# Altium PCB MolsonPCB.PcbDoc (part 8 of 9)
Units mil, origin at the board's own origin, x right, y up, seen from the top; angles counter-clockwise.
Board outline 8000 x 6000 mil, 14 copper layers (TopLayer (1 oz), InternalPlane1 (0.5 oz), InternalPlane2 (0.5 oz), MidLayer1 (0.5 oz), InternalPlane3 (0.5 oz), MidLayer2 (0.5 oz), InternalPlane4 (0.5 oz), InternalPlane5 (0.5 oz), MidLayer3 (0.5 oz), InternalPlane6 (0.5 oz), MidLayer4 (0.5 oz), InternalPlane7 (0.5 oz), InternalPlane8 (0.5 oz), BottomLayer (1 oz)), stack 86.2 mil thick; 657 components, 643 nets, 3094 pads, 1958 vias.
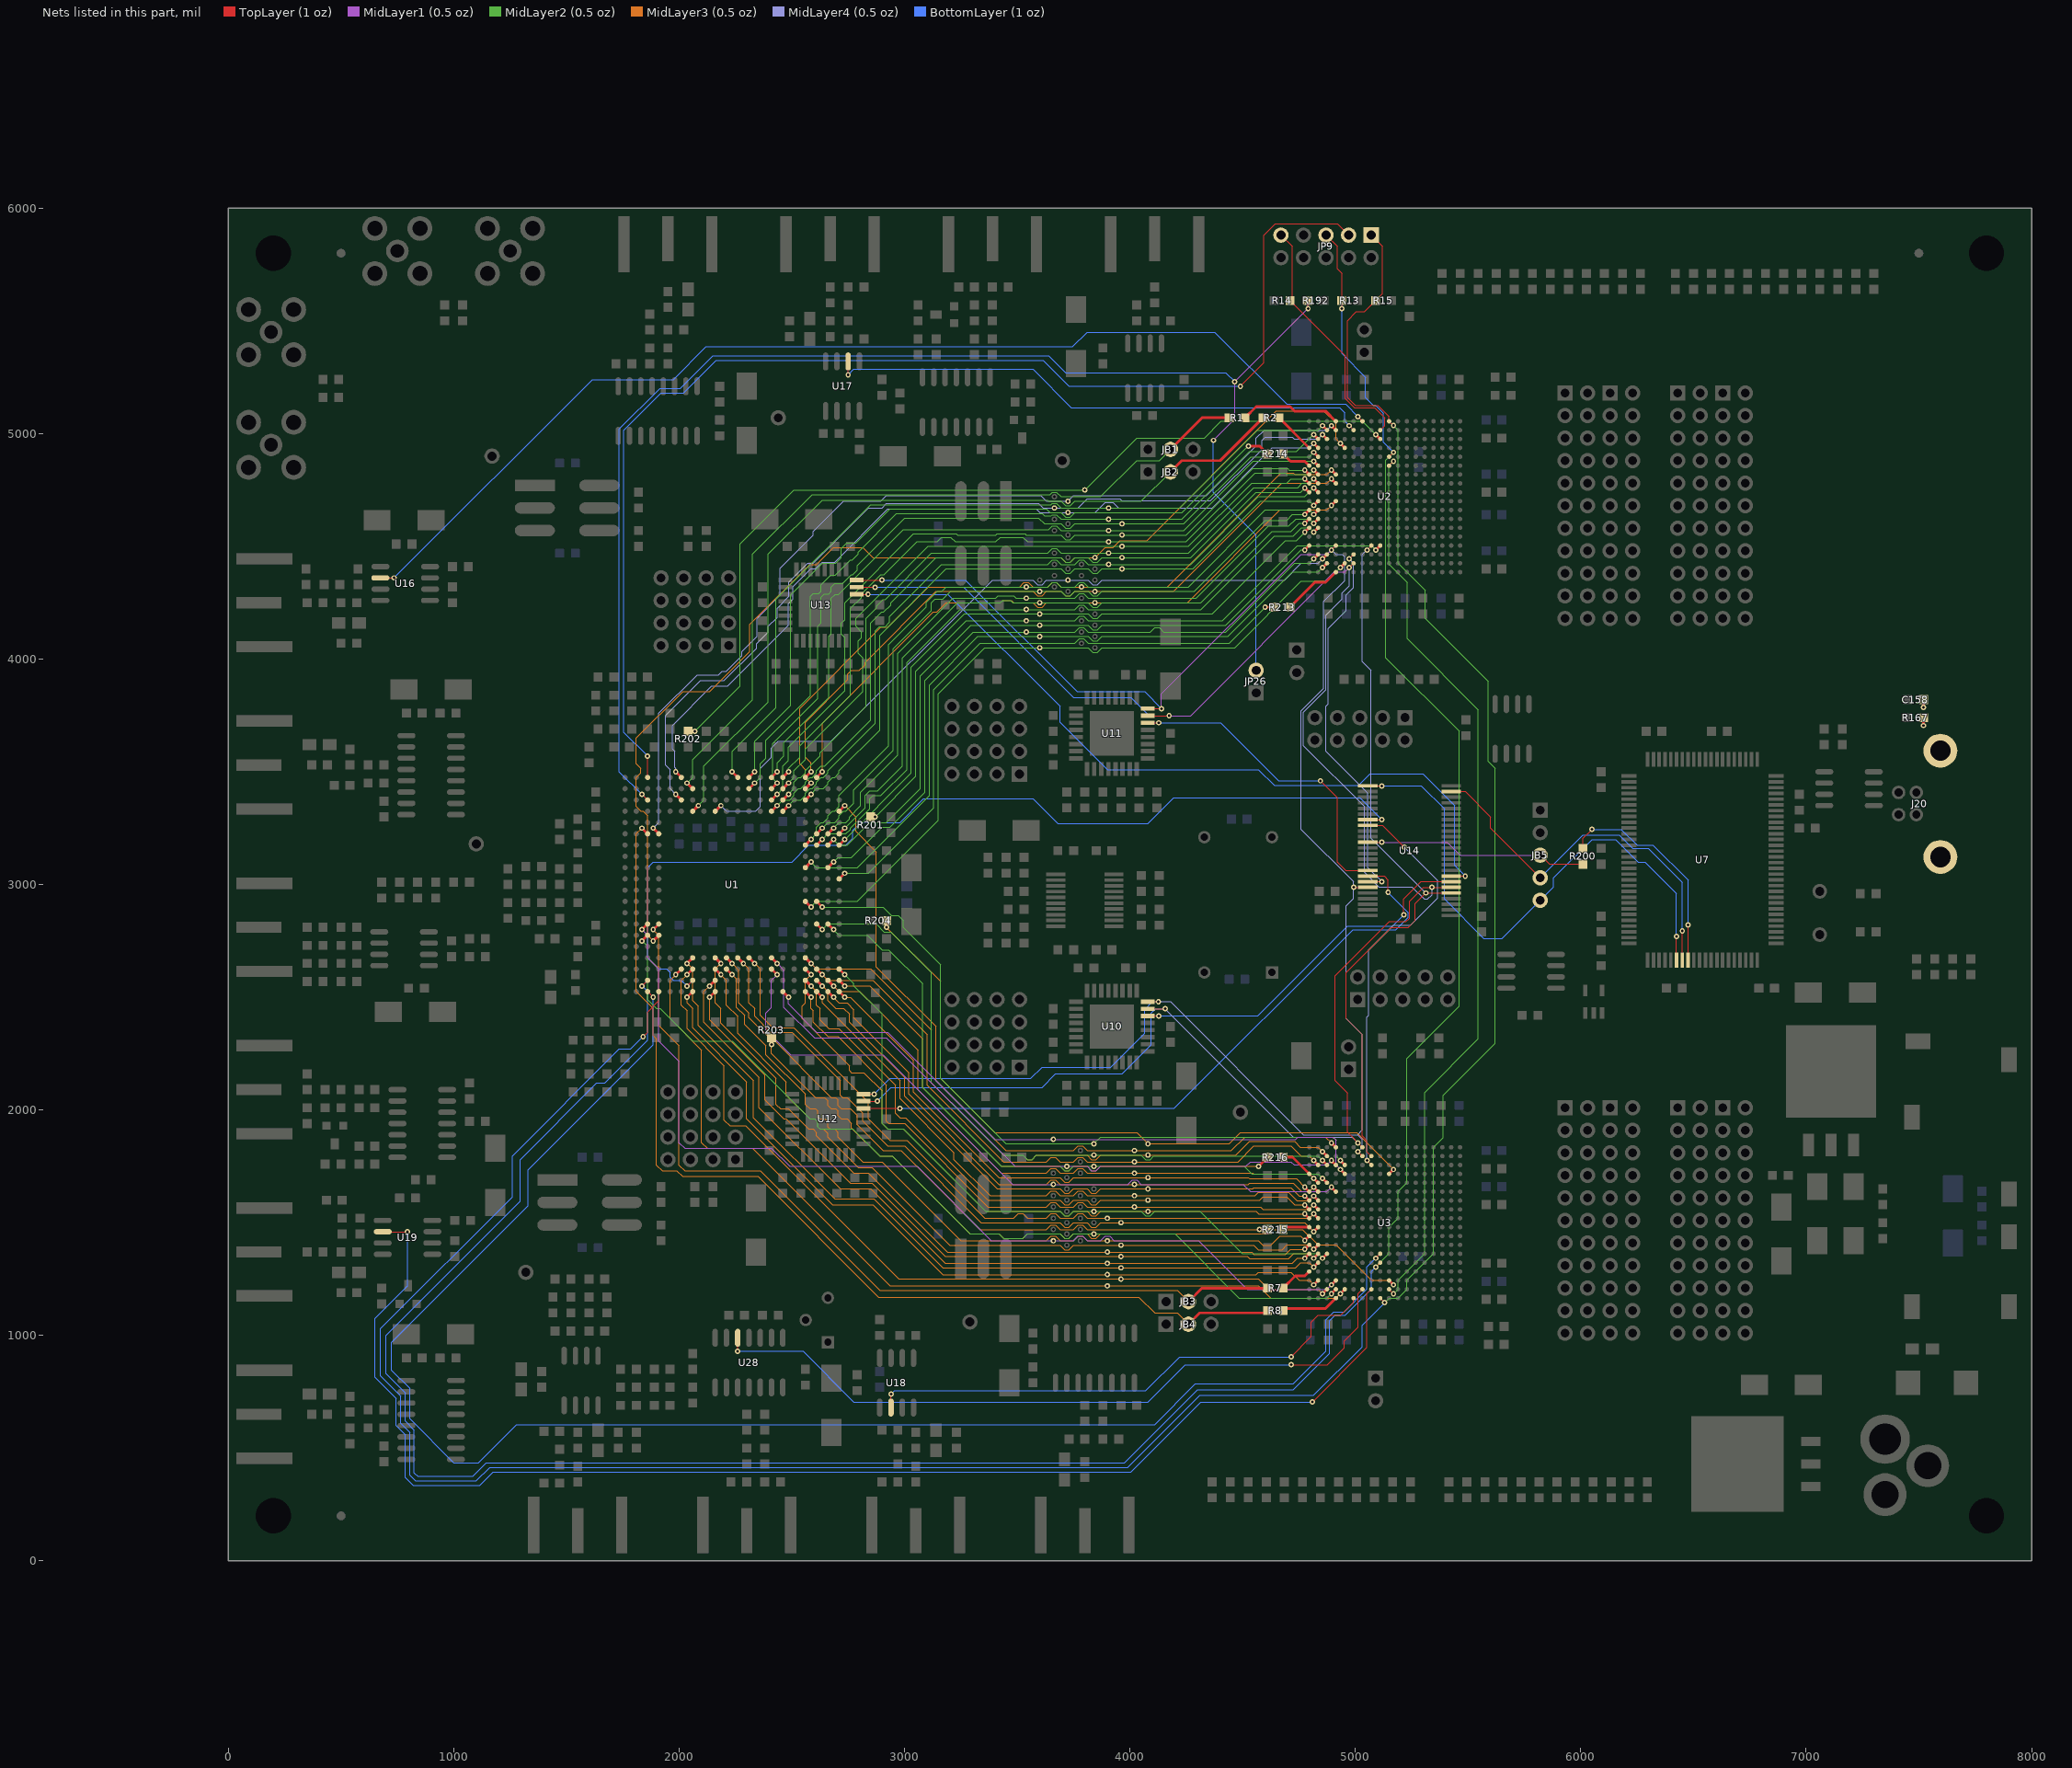
[diagram p20: the nets of this part, all layers, seen from the top]

## Via types
v1: diameter 24, hole 12, TopLayer (1 oz) to BottomLayer (1 oz), 1958 vias

## Nets (pads, with @x,y where several pads share a name; then routed paths per layer and width w, separated by ;. In a path a pad name is that pad's centre, name@x,y a point inside that pad or via, vN(x,y) a via of type N, cw(c..) or ccw(c..) an arc to the next point about the centre after c; other vN are vias at no path point) (continued)
RXDD7: pad.TVIA@3840,1550 U1.Y3 U3.T13 | length 3026.6
  TopLayer (1 oz) w12: U1.Y3@2710,2625 v1(2735,2600) ; v1(4854.41,1342.52) U3.T13@4874.1,1362.2
  MidLayer2 (0.5 oz) w5: v1(2735,2600) 2775,2560 2775,2550 2900,2425 2900,1940 2925,1915 2995,1915 3360,1550 3690,1550 3710,1530 3730,1530 3750,1550 4050,1550 4070,1530 4090,1530 4110,1550 4310,1550 4497.8,1362.2 4834.72,1362.2 v1(4854.41,1342.52)
RXSTA0: pad.TVIA@3845,4250 U1.V20 U2.D9 | length 2961.8
  TopLayer (1 oz) w12: U1.V20@2610,3475 v1(2635,3500) ; v1(4893.78,4680.63) U2.D9@4913.47,4700.31
  MidLayer3 (0.5 oz) w5: v1(2635,3500) 2635,3715 3128.05,4208.05 3143.05,4208.05 3185,4250 3425,4250 3435,4260 3475,4260 3485,4250 3570,4250 3590,4230 3610,4230 3630,4250 4255,4250 4665.94,4660.94 4874.1,4660.94 v1(4893.78,4680.63)
RXSTA1: pad.TVIA@3845,4300 U1.U20 U2.D11 | length 3127.8
  TopLayer (1 oz) w12: U1.U20@2560,3475 v1(2585,3500) ; v1(4893.78,4798.74) U2.D11@4913.47,4779.06
  MidLayer3 (0.5 oz) w5: v1(2585,3500) 2585,3540 2560,3565 2560,3720 2748.21,3908.21 2748.21,3933.21 2764.11,3949.11 2799.11,3949.11 2824.96,3974.96 2824.96,3984.96 3140,4300 3570,4300 3590,4280 3610,4280 3630,4300 3695,4300 3715,4280 3735,4280 3755,4300 4195,4300 4674.06,4779.06 4874.1,4779.06 v1(4893.78,4798.74)
RXSTA2: pad.TVIA@3785,4320 U1.U19 U2.D12 | length 3249.6
  TopLayer (1 oz) w12: U1.U19@2560,3425 v1(2585,3450) ; v1(4893.78,4838.11) U2.D12@4913.47,4818.43
  MidLayer3 (0.5 oz) w5: v1(2585,3450) 2560,3475 2560,3510 2535,3535 2535,3780 2895.57,4140.57 2925.57,4140.57 3105,4320 3510,4320 3530,4340 3550,4340 3570,4320 3635,4320 3655,4340 3675,4340 3695,4320 4165,4320 4670,4825 4725,4825 4731.57,4818.43 4874.1,4818.43 v1(4893.78,4838.11)
RXSTB0: pad.TVIA@3725,4650 U1.F20 U2.B15 | length 3758
  TopLayer (1 oz) w12: v1(1985,3500) U1.F20@2010,3475 ; v1(4815.04,4956.22) U2.B15@4834.73,4936.53
  MidLayer4 (0.5 oz) w5: v1(1985,3500) 1985,3515 1980,3520 1980,3590 1970,3600 1970,3705 2145,3880 2215,3880 2485,4150 2485,4245 2505.41,4265.41 2505.41,4320.41 2585,4400 2605,4400 2635,4430 2690,4430 2925,4665 3585,4665 3600,4650 3845,4650 3890,4695 3925,4695 3949.18,4670.82 4365.82,4670.82 4631.54,4936.54 4795.35,4936.54 v1(4815.04,4956.22)
RXSTB1: pad.TVIA@3665,4670 U1.F18 U2.C16 | length 4004.5
  TopLayer (1 oz) w12: v1(1985,3400) U1.F18@2010,3375 ; v1(4854.41,4995.59) U2.C16@4874.1,4975.9
  MidLayer4 (0.5 oz) w5: v1(1985,3400) 1960,3425 1960,3510 1940,3530 1940,3750 2095,3905 2200,3905 2343.13,4048.13 2343.13,4068.13 2395,4120 2395,4145 2435,4185 2435,4225 2487.23,4277.23 2487.23,4342.23 2569.72,4424.72 2594.72,4424.72 2840,4670 2900,4670 2920,4690 3595,4690 3615,4670 3770,4670 3810,4710 3955,4710 3963.35,4701.65 4356.65,4701.65 4585,4930 4585,4970 4600,4985 4720,4985 4729.09,4975.91 4834.72,4975.91 v1(4854.41,4995.59)
RXSTB2: pad.TVIA@3725,4350 U1.J17 U2.C3 | length 3362.8
  TopLayer (1 oz) w12: U1.J17@2160,3325 v1(2185,3350) ; v1(4854.41,4444.41) U2.C3@4874.1,4464.1
  MidLayer4 (0.5 oz) w5: v1(2185,3350) 2210,3325 2340,3325 2360,3345 2360,3515 2410,3565 2410,3605 2440,3635 2675,3635 3390,4350 3570,4350 3590,4330 3610,4330 3630,4350 3815,4350 3835,4330 3855,4330 3875,4350 4685,4350 4759.73,4424.73 4834.73,4424.73 v1(4854.41,4444.41)
RXSTC0: pad.TVIA@3660,1670 U1.P3 U3.R6 | length 3159.5
  TopLayer (1 oz) w12: U1.P3@2410,2625 v1(2435,2600) ; v1(4893.78,1657.48) U3.R6@4913.47,1637.8
  MidLayer1 (0.5 oz) w5: v1(2435,2600) 2410,2575 2410,2455 2385,2430 2385,2355 2495,2245 2905,2245 3480,1670 3990,1670 4010,1690 4030,1690 4050,1670 4502.8,1670 4535,1637.8 4874.09,1637.8 v1(4893.78,1657.48)
RXSTC1: pad.TVIA@3720,1750 U1.P4 U3.R3 | length 3030.3
  TopLayer (1 oz) w12: U1.P4@2410,2675 v1(2435,2650) ; v1(4893.78,1775.59) U3.R3@4913.47,1755.9
  MidLayer1 (0.5 oz) w5: v1(2435,2650) 2465,2620 2465,2455 2600,2320 2920,2320 3490,1750 3810,1750 3830,1730 3850,1730 3870,1750 4515,1750 4535,1770 4715,1770 4729.09,1755.91 4874.09,1755.91 v1(4893.78,1775.59)
RXSTC2: pad.TVIA@3660,1870 U1.R1 U3.P4 | length 2918.4
  TopLayer (1 oz) w12: U1.R1@2460,2525 v1(2485,2500) ; v1(4933.15,1736.22) U3.P4@4952.84,1716.53
  MidLayer1 (0.5 oz) w5: v1(2485,2500) 2485,2470 2610,2345 2925,2345 3400,1870 4735,1870 4745,1880 4900,1880 4913.46,1866.54 4913.46,1755.9 v1(4933.15,1736.22)
RXSTD0: pad.TVIA@3840,1800 U1.V7 U3.T3 | length 3043.9
  TopLayer (1 oz) w12: U1.V7@2610,2825 v1(2635,2800) ; v1(4854.41,1775.59) U3.T3@4874.1,1755.9
  MidLayer2 (0.5 oz) w5: v1(2635,2800) 2660,2825 2875,2825 2910,2790 2940,2790 3120,2610 3120,2120 3440,1800 3525,1800 3545,1780 3565,1780 3585,1800 4050,1800 4070,1780 4090,1780 4105.28,1795.28 4834.72,1795.28 v1(4854.41,1775.59)
RXSTD1: pad.TVIA@3840,1750 U1.W7 U3.T5 | length 2975.6
  TopLayer (1 oz) w12: U1.W7@2660,2825 v1(2685,2800) ; v1(4854.41,1696.85) U3.T5@4874.1,1677.16
  MidLayer2 (0.5 oz) w5: v1(2685,2800) 2710,2775 2835,2775 2900,2710 2930,2710 3080,2560 3080,2100 3430,1750 3690,1750 3710,1730 3730,1730 3750,1750 4506.54,1750 4540,1716.54 4834.72,1716.54 v1(4854.41,1696.85)
RXSTD2: pad.TVIA@3840,1850 U1.V9 U3.P3 | length 3207.1
  TopLayer (1 oz) w12: U1.V9@2610,2925 v1(2635,2900) ; v1(4933.15,1775.59) U3.P3@4952.84,1755.9
  MidLayer2 (0.5 oz) w5: v1(2635,2900) 2905,2900 2942.66,2862.34 2972.66,2862.34 2995,2840 2995,2810 3160,2645 3160,2140 3450,1850 pad.TVIA@3840,1850 3870,1880 4900,1880 4913.46,1866.54 4913.46,1795.27 v1(4933.15,1775.59)
S_01: C158.2 J20.5 J20.6 R167.2 | length 70
  TopLayer (1 oz) w12: v1(7520,3705) R167.2@7520,3740 ; v1(7520,3785) C158.2@7520,3820
SCL: U2.D4 U3.M2 U10.8 U11.8 U12.8 U13.8 U14.43 | length 8521.3
  TopLayer (1 oz) w5: U13.8@2788.46,4350.24 v1@2900,4350.24 ; U12.8@2818.46,2070.24 v1(2865.24,2070.24) ; U10.8@4078.46,2480.24 v1(4126.69,2480.24) ; U11.8@4078.46,3780.24 v1(4139.76,3780.24) ; v1(4893.78,4483.78) U2.D4@4913.47,4503.47 ; v1(4992.5,2987.5) U14.43@5054.96,2987.5 ; v1(5011.89,1814.96) U3.M2@5031.57,1795.27
  MidLayer1 (0.5 oz) w5: v1(4139.76,3780.24) 4139.76,3844.76 4759.1,4464.1 4874.1,4464.1 v1(4893.78,4483.78)
  MidLayer4 (0.5 oz) w5: v1(4126.69,2480.24) 4179.76,2480.24 4770,1890 5010,1890 ; v1(4893.78,4483.78) 4913.46,4464.1 4942.99,4464.1 4952.83,4454.25 4952.83,4347.83 4860,4255 4860,3870 4760,3770 4760,3245 4992.5,3012.5 4992.5,2937.5 4960,2905 4960,2405 5031.57,2333.43 5031.57,1911.57 5010,1890 ; v1(5011.89,1814.96) 5031.57,1834.65 5031.57,1868.43 5010,1890
  BottomLayer (1 oz) w5: v1(2865.24,2070.24) 2935,2140 3560,2140 3610,2190 3915,2190 4065,2340 4065,2445 4100.24,2480.24 v1(4126.69,2480.24) ; v1(2900.24,4350.24) 3269.76,4350.24 3765,3855 4065,3855 v1(4139.76,3780.24)
SCSA_07: U11.6 U14.40 | length 1414.6
  TopLayer (1 oz) w5: U11.6@4078.46,3717.24 v1(4127.76,3717.24) ; v1(4845,3460) 4920,3385 4920,3100 4957.5,3062.5 U14.40@5054.96,3062.5
  BottomLayer (1 oz) w5: v1(4127.76,3717.24) 4402.76,3717.24 4660,3460 v1(4845,3460)
SCSB_07: U13.6 U14.8 | length 3516.8
  TopLayer (1 oz) w5: U13.6@2788.46,4287.24 v1(2837.76,4287.24) ; U14.8@5425.04,3037.5 v1(5487.5,3037.5)
  BottomLayer (1 oz) w5: v1(2837.76,4287.24) 3192.76,4287.24 3690,3790 3690,3720 3900,3510 4570,3510 4640,3440 5015,3440 5065,3490 5300,3490 5440,3350 5440,3085 v1(5487.5,3037.5)
SCSC_07: U12.6 U14.41 | length 3067.3
  TopLayer (1 oz) w5: U12.6@2818.46,2007.24 v1(2980,2007.24) ; U14.41@5054.96,3037.5 5127.5,3037.5 5145,3020 v1(5145,2965)
  BottomLayer (1 oz) w5: v1(2980,2007.24) 4197.24,2007.24 4990,2800 5180,2800 5235,2855 5235,2875 v1(5145,2965)
SCSD_07: U10.6 U14.7 | length 1634.1
  TopLayer (1 oz) w5: U10.6@4078.46,2417.24 v1(4127.24,2417.24) ; v1(5215,2865) 5215,2935 5292.5,3012.5 U14.7@5425.04,3012.5
  BottomLayer (1 oz) w5: v1(4127.24,2417.24) 4567.24,2417.24 4965,2815 5165,2815 v1(5215,2865)
SCSE: U2.F3 U14.42 | length 1683.6
  TopLayer (1 oz) w5: v1(4972.52,4444.41) U2.F3@4992.2,4464.1 ; U14.42@5054.96,3012.5 v1(5117.5,3012.5)
  MidLayer4 (0.5 oz) w5: v1(4972.52,4444.41) 4992.2,4424.72 4992.2,4317.2 4960,4285 4960,4215 4880,4135 4880,3800 4870,3790 4870,3590 5055,3405 5055,3075 v1(5117.5,3012.5)
SCSE1: U3.L3 U14.32 | length 1855.2
  TopLayer (1 oz) w5: v1(5051.26,1775.59) U3.L3@5070.94,1755.9 ; U14.32@5054.96,3262.5 5120,3262.5 v1(5217.5,3165)
  MidLayer4 (0.5 oz) w5: v1(5051.26,1775.59) 5051.26,2411.26 5060,2420 5060,2710 5170,2820 5245,2820 5365,2940 5365,3017.5 v1(5217.5,3165)
SD/H\D\A: U2.G18 U16.6 | length 4971.8
  TopLayer (1 oz) w5: U16.6@675,4360 v1(735,4360) ; v1(5011.89,5074.33) U2.G18@5031.57,5054.65
  BottomLayer (1 oz) w5: v1(735,4360) 1615,5240 1975,5240 2120,5385 3745,5385 3810,5450 4375,5450 4695,5130 4956.22,5130 v1(5011.89,5074.33)
SD/H\D\B: U2.F17 U17.6 | length 2446.3
  TopLayer (1 oz) w5: v1(2750,5260) U17.6@2750,5320 ; v1(4972.52,5034.96) U2.F17@4992.2,5015.27
  BottomLayer (1 oz) w5: v1(2750,5260) 2775,5285 3570,5285 3740,5115 4930,5115 4952.83,5092.17 4952.83,5054.65 v1(4972.52,5034.96)
SD/H\D\C: U3.N18 U18.6 | length 2337.1
  TopLayer (1 oz) w5: U18.6@2940,680 v1(2940,740) ; v1(4715,905) 4805,995 4805,1060 4835,1090 4935,1090 4992.2,1147.2 U3.N18@4992.2,1165.35
  BottomLayer (1 oz) w5: v1(2940,740) 2955,755 4070,755 4220,905 v1(4715,905)
SD/H\D\D: U3.L17 U19.6 | length 6116.5
  TopLayer (1 oz) w5: U19.6@685,1460 v1(795,1460) ; v1(4810,705) 5051.26,946.26 5051.26,1185.04 U3.L17@5070.94,1204.73
  BottomLayer (1 oz) w5: v1(795,1460) 795,1220 650,1075 650,815 745,720 745,600 785,560 785,370 820,335 1115,335 1175,395 4005,395 4315,705 v1(4810,705)
SDI: U2.H4 U3.L2 U14.5 | length 3189.3
  TopLayer (1 oz) w5: v1(5051.26,4483.78) U2.H4@5070.94,4503.47 ; U3.L2@5070.94,1795.27 5051.26,1814.96 5051.26,1863.74 5030,1885 5030,2335 4960,2405 4960,2610 5160,2810 5235,2810 5265,2840 5265,2915 v1(5312.5,2962.5) U14.5@5425.04,2962.5
  MidLayer4 (0.5 oz) w5: v1(5051.26,4483.78) 5031.57,4464.1 5031.57,3988.43 5070,3950 5070,3205 v1(5312.5,2962.5)
SDO: U2.F2 U3.M1 U10.7 U11.7 U12.7 U13.7 U14.6 | length 9052.9
  TopLayer (1 oz) w5: U13.7@2788.46,4318.74 v1(2868.74,4318.74) ; U12.7@2818.46,2038.74 v1(2878.74,2038.74) ; U10.7@4078.46,2448.74 v1(4156.26,2448.74) ; U11.7@4078.46,3748.74 v1(4173.74,3748.74) ; v1(4972.52,4405.04) U2.F2@4992.2,4424.73 ; U3.M1@5031.57,1834.65 4965,1901.22 4965,2075 4910,2130 4910,2595 5150,2835 5225,2835 5240,2850 5240,2925 5302.5,2987.5 U14.6@5425.04,2987.5
  MidLayer1 (0.5 oz) w5: v1(4173.74,3748.74) 4268.74,3748.74 4905.35,4385.35 4952.84,4385.35 v1(4972.52,4405.04)
  MidLayer4 (0.5 oz) w5: v1(4156.26,2448.74) 4725,1880 4986.22,1880 v1(5011.89,1854.33) ; v1(4972.52,4405.04) 4972.52,4325.32 4940,4292.8 4940,4265 4870,4195 4870,3865 4770,3765 4770,3615 5040,3345 5040,3055 5105,2990 5250,2990 5305,2935 5320,2935 5340,2955 v1(5340,2987.5)
  BottomLayer (1 oz) w5: v1(2868.74,4318.74) 3261.26,4318.74 3750,3830 4005,3830 4086.26,3748.74 v1(4173.74,3748.74) ; v1(2878.74,2038.74) 2940,2100 3610,2100 3670,2160 3965,2160 4095,2290 4095,2430 4113.74,2448.74 v1(4156.26,2448.74)
SPDSELA: JB1.2 R1.2 U1.G19 | length 3552.6
  TopLayer (1 oz) w12: v1(2035,3450) U1.G19@2060,3425 ; JB1.2@4180,4930 4320,5070 R1.2@4440,5070
  MidLayer2 (0.5 oz) w5: v1(2035,3450) 2060,3475 2060,3555 2325,3820 2325,4465 2590,4730 3645,4730 3655,4740 3675,4740 3695,4720 3870,4720 4030,4880 4130,4880 JB1.2@4180,4930
SPDSELA'_04: R1.1 U2.D18 | length 451.2
  TopLayer (1 oz) w12: R1.1@4510,5070 4560,5120 4710,5120 4730,5100 4868.11,5100 U2.D18@4913.47,5054.65
SPDSELB: JB2.2 R2.2 U1.G17 | length 3745.1
  TopLayer (1 oz) w12: U1.G17@2060,3325 v1(2085,3350) ; JB2.2@4180,4830 4230,4880 4400,4880 R2.2@4590,5070
  MidLayer2 (0.5 oz) w5: v1(2085,3350) 2110,3375 2110,3525 2395,3810 2395,4465 2635,4705 3635,4705 3640,4700 3695,4700 3715,4680 3735,4680 3755,4700 4050,4700 JB2.2@4180,4830
SPDSELB'_04: R2.1 U2.A15 | length 188.7
  TopLayer (1 oz) w12: R2.1@4661.89,5070 U2.A15@4795.35,4936.53
SPDSELC: JB3.2 R7.2 U1.D7 | length 4013.4
  TopLayer (1 oz) w12: v1(1885,2800) U1.D7@1910,2825 ; JB3.2@4260,1150 4320,1210 R7.2@4610,1210
  MidLayer3 (0.5 oz) w5: v1(1885,2800) 1910,2775 1910,2375 2000,2285 2000,1755 2025,1730 2360,1730 2890,1200 4210,1200 JB3.2@4260,1150
SPDSELC'_05: R7.1 U3.V15 | length 145.8
  TopLayer (1 oz) w12: R7.1@4680,1210 4733.78,1263.78 4775.67,1263.78 U3.V15@4795.35,1283.47
SPDSELD: JB4.2 R8.2 U1.C15 | length 4580.7
  TopLayer (1 oz) w12: v1(1835,3250) U1.C15@1860,3225 ; JB4.2@4260,1050 4310,1100 R8.2@4590,1100
  MidLayer3 (0.5 oz) w5: v1(1835,3250) 1810,3225 1810,2525 1885,2450 1885,2330 1900,2315 1900,1755 1925,1730 1990,1730 2015,1705 2350,1705 2885,1170 4040,1170 4110,1100 4210,1100 JB4.2@4260,1050
SPDSELD'_05: R8.1 U3.R18 | length 252.3
  TopLayer (1 oz) w12: R8.1@4680,1120 4868.11,1120 U3.R18@4913.47,1165.35
SSI/CDC2: U3.M17 U28.12 | length 3235.9
  TopLayer (1 oz) w5: v1(2259.86,930.14) U28.12@2259.86,989.68 ; v1(4715,870) 4875,870 4950,945 4950,975 5011.89,1036.89 5011.89,1185.04 U3.M17@5031.57,1204.73
  BottomLayer (1 oz) w5: v1(2259.86,930.14) 2549.86,930.14 2775,705 4080,705 4245,870 v1(4715,870)
TCK: JP9.1 R15.2 U1.D1 U2.K18 U3.K18 | length 12882.6
  TopLayer (1 oz) w5: v1(1840,2325) 1860,2345 1860,2435 1910,2485 U1.D1@1910,2525 ; JP9.1@5070.06,5880.31 5120,5830.37 5120,5620 R15.2@5090,5590 5040,5540 5005,5540 4965,5500 4965,5160 5000,5125 5100,5125 5149.69,5075.31 U2.K18@5149.69,5054.65 ; U3.K18@5110.27,1165 v1(5129.96,1145.32) ; U2.K18@5149.69,5055 5149.86,5054.82 v1(5169.37,5035.31)
  MidLayer2 (0.5 oz) w5: v1(5129.96,1145.32) 5150,1165.35 5189.06,1165.35 5228.43,1204.72 5228.43,1244.09 5346.54,1362.2 5346.54,1834.65 5390,1878.11 5390,2065 5620,2295 5620,3515 5590,3545 5590,3900 5310,4180 5310,4305 5189.06,4425.94 5189.06,5015.63 v1(5169.37,5035.31)
  BottomLayer (1 oz) w5: v1(1840,2325) 1785,2270 1735,2270 1260,1795 1260,1615 675,1030 675,820 765,730 765,610 805,570 805,380 830,355 1100,355 1160,415 3990,415 4310,735 4815,735 5030,950 5030,1045.36 v1(5129.96,1145.32)
TD1_03: JP9.9 R14.1 U2.J17 | length 1120.6
  TopLayer (1 oz) w5: JP9.9@4670.06,5880.31 4720,5830.37 R14.1@4720,5590 ; R14.1@4710,5590 4955,5345 4955,5155 4995,5115 5085,5115 5130,5070 5130,5034.96 U2.J17@5110.31,5015.27
TD2_03: U2.K13 U3.J17 | length 4075.9
  TopLayer (1 oz) w5: U3.J17@5149.69,1204.73 v1@5169.23,1184.9 ; U2.K13@5149.69,4857.8 v1(5169.37,4877.48) ; U3.J17@5149.84,1204.57 U3.J17@5150,1204.73
  MidLayer2 (0.5 oz) w5: v1(5169.33,1185) 5189.06,1204.72 5189.06,1244.09 5307.17,1362.2 5307.17,2077.17 5545,2315 5545,3775 5230,4090 5230,4340 5149.69,4420.31 5149.69,4857.8 v1(5169.37,4877.48)
TD3: U1.C1 U3.K13 | length 7327.9
  TopLayer (1 oz) w5: U1.C1@1860,2525 v1(1885,2500) ; v1(5090.63,1342.52) U3.K13@5110.31,1362.2
  BottomLayer (1 oz) w5: v1(1885,2500) 1885,2290 1330,1735 1330,1575 725,970 725,845 805,765 805,630 1000,435 1110,435 1280,605 4110,605 4290,785 4725,785 4870,930 4870,1070 4905,1105 4950,1105 5051.26,1206.26 5051.26,1303.15 v1(5090.63,1342.52)
TD4: JP9.3 U1.C20 | length 5624.7
  TopLayer (1 oz) w5: U1.C20@1860,3475 v1(1860,3570) ; v1(4490,5210) 4595,5315 4595,5880 4645.37,5930.37 4920,5930.37 JP9.3@4970.06,5880.31
  BottomLayer (1 oz) w5: v1(1860,3570) 1755,3675 1755,5015 1920,5180 2020,5180 2165,5325 3615,5325 3730,5210 v1(4490,5210)
TMRESET#: JP26.2 R192.1 U1.C18 | length 6501.7
  TopLayer (1 oz) w5: v1(1835,3400) U1.C18@1860,3375 ; v1(4790,5555) R192.1@4790,5590
  MidLayer1 (0.5 oz) w5: v1(4370,4970) 4465,5065 v1(4465,5230) v1(4790,5555)
  BottomLayer (1 oz) w5: v1(1835,3400) 1735,3500 1735,5020 1915,5200 2005,5200 2150,5345 3640,5345 3715,5270 4425,5270 v1(4465,5230) ; v1(4370,4970) 4370,4740 4560,4550 JP26.2@4560,3950
TMS: JP9.5 R13.1 U1.C2 U2.K14 U3.K14 | length 12609.7
  TopLayer (1 oz) w5: v1(1835,2550) U1.C2@1860,2575 ; JP9.5@4870.06,5880.31 4920,5830.37 4920,5730 4940,5710 v1(4940,5555) ; v1(5090.63,1303.15) U3.K14@5110.31,1322.84 ; U2.K14@5149.69,4897.16 v1(5169.37,4916.85)
  MidLayer2 (0.5 oz) w5: v1(5090.63,1303.15) 5149.69,1362.2 5149.69,1480.31 5189.06,1519.69 5189.06,1637.8 5228.43,1677.17 5228.43,2228.43 5460,2460 5460,3680 5135,4005 5135,4882.48 v1(5169.37,4916.85)
  BottomLayer (1 oz) w5: v1(1835,2550) 1860,2525 1860,2310 1670,2120 1635,2120 1295,1780 1295,1595 700,1000 700,830 785,745 785,620 825,580 825,390 840,375 1085,375 1145,435 3975,435 4300,760 4725,760 4885,920 4885,1065 4910,1090 4955,1090 5070.94,1205.94 5070.94,1283.46 v1(5090.63,1303.15) ; v1(4940,5555) 4940,5355 5045,5250 5045,5160 5080,5125 5090,5125 5125,5090 5125,4961.22 v1(5169.37,4916.85)
TXCLKA: R213.1 U1.Y11 | length 2753.2
  TopLayer (1 oz) w12: U1.Y11@2710,3025 v1(2735,3050) ; v1(4600,4230) R213.1@4640,4230
  MidLayer2 (0.5 oz) w5: v1(2735,3050) 2840,3050 3130,3340 3130,3865 3335,4070 3755,4070 3775,4090 3795,4090 3815,4070 4440,4070 v1(4600,4230)
TXCLKA_04: R213.2 U2.D1 | length 267.8
  TopLayer (1 oz) w12: R213.2@4710,4230 4820,4340 4868.11,4340 U2.D1@4913.47,4385.35
TXCLKB: R214.1 U1.M20 | length 3342.1
  TopLayer (1 oz) w12: U1.M20@2310,3475 v1(2335,3500) ; v1(4525,4945) 4575,4945 R214.1@4610,4910
  MidLayer2 (0.5 oz) w5: v1(2335,3500) 2335,3635 2495,3795 2495,4285 2635,4425 2695,4425 2719.53,4449.53 2719.53,4489.53 2744.2,4514.2 2784.2,4514.2 2935.16,4665.16 3629.84,4665.16 3645,4650 3695,4650 3715,4630 3735,4630 3755,4650 4230,4650 v1(4525,4945)
TXCLKB_04: R214.2 U2.A13 | length 137
  TopLayer (1 oz) w12: R214.2@4680,4910 4712.52,4877.48 4775.67,4877.48 U2.A13@4795.35,4857.8
TXCLKC: R215.1 U1.K4 | length 3067
  TopLayer (1 oz) w12: U1.K4@2210,2675 v1(2235,2650) ; v1(4575,1470) R215.1@4610,1470
  MidLayer3 (0.5 oz) w5: v1(2235,2650) 2265,2620 2265,2475 2310,2430 2310,2410 2395,2325 2405,2325 2675,2055 2695,2055 2705,2045 2705,2020 2720,2005 2760,2005 2790,1975 2790,1935 2905,1820 2985,1820 3335,1470 3630,1470 3650,1490 3670,1490 3690,1470 3750,1470 3770,1490 3790,1490 3810,1470 v1(4575,1470)
TXCLKC_05: R215.2 U3.V10 | length 125
  TopLayer (1 oz) w12: R215.2@4680,1470 R215.2@4680,1480 ; R215.2@4680.31,1480.31 U3.V10@4795.35,1480.31
TXCLKD: R216.1 U1.Y2 | length 2417.4
  TopLayer (1 oz) w12: U1.Y2@2710,2575 v1(2735,2550) ; v1(4570,1750) R216.1@4610,1790
  MidLayer3 (0.5 oz) w5: v1(2735,2550) 2845,2550 3080,2315 3080,2100 3430,1750 3690,1750 3710,1730 3730,1730 3750,1750 3810,1750 3830,1730 3850,1730 3870,1750 v1(4570,1750)
TXCLKD_05: R216.2 U3.V4 | length 145.8
  TopLayer (1 oz) w12: R216.2@4680,1790 4721.89,1790 U3.V4@4795.35,1716.53
TXCLKOA: pad.TVIA@3540,4170 R201.1 U2.J4 | length 3044.1
  TopLayer (1 oz) w12: v1(5090.63,4483.78) U2.J4@5110.31,4503.47
  MidLayer2 (0.5 oz) w5: v1(2870,3300) 3050,3480 3050,3945 3275,4170 3755,4170 3775,4190 3795,4190 3815,4170 4410,4170 4743.46,4503.46 5070.95,4503.46 v1(5090.63,4483.78)
TXCLKOB: pad.TVIA@3800,4750 R202.1 U2.J16 | length 4041.4
  TopLayer (1 oz) w12: R202.1@2040,3680 v1(2070,3680) ; v1(5090.63,4995.59) U2.J16@5110.31,4975.9
  MidLayer2 (0.5 oz) w5: v1(2070,3680) 2270.07,3880.07 2270.07,4510.07 2510,4750 pad.TVIA@3800,4750 4030,4980 4330,4980 4404.65,5054.65 5031.57,5054.65 v1(5090.63,4995.59)
TXCLKOC: R203.1 U3.J16 | length 3383.4
  TopLayer (1 oz) w12: v1(2410,2290) R203.1@2410,2320 ; U3.J16@5149.69,1244.1 v1(5169.37,1224.41)
  MidLayer3 (0.5 oz) w5: v1(2410,2290) 2410,2250 2605,2055 2645,2055 2660,2040 2660,2020 2675,2005 2695,2005 2705,1995 2705,1975 2720,1960 2745,1960 2765,1940 2765,1920 2890,1795 2945,1795 3290,1450 3420,1450 3440,1430 3525,1430 3545,1450 3690,1450 3710,1430 3730,1430 3750,1450 3810,1450 3830,1430 3850,1430 3870,1450 4615,1450 4635,1470 4766.3,1470 4834.72,1401.57 4913.46,1401.57 5070.94,1244.09 5149.69,1244.09 v1(5169.37,1224.41)
TXCLKOD: pad.TVIA@4080,1850 R204.1 U3.J4 | length 3045.3
  TopLayer (1 oz) w12: v1(2920,2810) R204.1@2920,2840 ; U3.J4@5149.69,1716.53 v1(5169.37,1736.22)
  MidLayer3 (0.5 oz) w5: v1(2920,2810) 3160,2570 3160,2140 3400,1900 4030,1900 pad.TVIA@4080,1850 4440,1850 4490,1900 5005.59,1900 v1(5169.37,1736.22)
TXCTA0: pad.TVIA@3600,4350 U1.U15 U2.A9 | length 3198.8
  TopLayer (1 oz) w12: U1.U15@2560,3225 v1(2585,3250) ; v1(4775.67,4680.63) U2.A9@4795.35,4700.31
  MidLayer2 (0.5 oz) w5: v1(2585,3250) 2610,3275 2610,3305 2630,3325 2640,3325 2660,3345 2660,3395 2710,3445 2710,3455 2730,3475 2740,3475 2910,3645 2910,4085 3069.98,4244.98 3069.98,4259.98 3130,4320 3145,4320 3175,4350 3695,4350 3715,4330 3735,4330 3755,4350 3815,4350 3835,4330 3855,4330 3875,4350 4260,4350 4590.63,4680.63 v1(4775.67,4680.63)
TXCTA0: 
TXCTA1: 
TXCTA1: pad.TVIA@3600,4050 U1.U9 U2.E2 | length 3379.4
  TopLayer (1 oz) w12: U1.U9@2560,2925 v1(2585,2900) ; v1(4933.15,4405.04) U2.E2@4952.84,4424.73
  MidLayer2 (0.5 oz) w5: v1(2585,2900) 2610,2925 2790,2925 3150,3285 3150,3845 3355,4050 3815,4050 3835,4030 3855,4030 3875,4050 4465,4050 4760,4345 4873.11,4345 v1(4933.15,4405.04)
TXCTB0: pad.TVIA@3965,4400 U1.U18 U2.B9 | length 3130.9
  TopLayer (1 oz) w12: U1.U18@2560,3375 v1(2585,3400) ; v1(4815.04,4680.63) U2.B9@4834.73,4700.31
  MidLayer2 (0.5 oz) w5: v1(2585,3400) 2610,3425 2640,3425 2660,3445 2660,3455 2680,3475 2690,3475 2710,3495 2710,3505 2890,3685 2890,4105 3185,4400 3695,4400 3715,4380 3735,4380 3755,4400 3815,4400 3835,4380 3855,4380 3875,4400 4280,4400 4580.31,4700.31 4795.35,4700.31 v1(4815.04,4680.63)
TXCTB1: pad.TVIA@3965,4500 U1.R19 U2.A11 | length 3201.7
  TopLayer (1 oz) w12: U1.R19@2460,3425 v1(2485,3450) ; v1(4775.67,4798.74) U2.A11@4795.35,4779.06
  MidLayer2 (0.5 oz) w5: v1(2485,3450) 2510,3475 2510,3505 2560,3555 2560,3600 2815,3855 2815,4005 2795,4025 2795,4080 2810,4095 2810,4120 2785,4145 2785,4180 3105,4500 4260,4500 4540,4780 4695,4780 4713.74,4798.74 v1(4775.67,4798.74)
TXCTC0: pad.TVIA@3900,1420 U1.K3 U3.V11 | length 3342.9
  TopLayer (1 oz) w12: U1.K3@2210,2625 v1(2235,2600) ; v1(4775.67,1421.26) U3.V11@4795.35,1440.94
  MidLayer3 (0.5 oz) w5: v1(2235,2600) 2255,2580 2255,2455 2290,2420 2290,2380 2385,2285 2385,2245 2560,2070 2560,2025 2580,2005 2605,2005 2615,1995 2615,1970 2625,1960 2645,1960 2660,1945 2660,1925 2670,1915 2690,1915 2705,1900 2705,1880 2815,1770 2900,1770 3250,1420 3630,1420 3650,1440 3670,1440 3690,1420 3750,1420 3770,1440 3790,1440 3810,1420 4570,1420 4590,1400 4625,1400 4665,1440 4756.93,1440 v1(4775.67,1421.26)
TXCTC1: pad.TVIA@3960,1350 U1.J1 U3.U13 | length 3364.1
  TopLayer (1 oz) w12: v1(2135,2500) U1.J1@2160,2525 ; v1(4815.04,1342.52) U3.U13@4834.73,1362.2
  MidLayer3 (0.5 oz) w5: v1(2135,2500) 2135,2400 2380,2155 2380,2045 2465,1960 2475,1960 2760,1675 2855,1675 3180,1350 4520,1350 4530,1340 4705,1340 4727.2,1362.2 4795.35,1362.2 v1(4815.04,1342.52)
TXCTD0: pad.TVIA@4020,1770 U1.V3 U3.U3 | length 2807.6
  TopLayer (1 oz) w12: U1.V3@2610,2625 v1(2635,2600) ; v1(4815.04,1775.59) U3.U3@4834.73,1755.9
  MidLayer3 (0.5 oz) w5: v1(2635,2600) 2660,2575 2860,2575 3100,2335 3100,2110 3440,1770 3630,1770 3650,1790 3670,1790 3690,1770 3750,1770 3770,1790 3790,1790 3810,1770 4480,1770 4550,1840 4715,1840 4759.72,1795.28 4795.35,1795.28 v1(4815.04,1775.59)
TXCTD1: pad.TVIA@4080,1800 U1.U4 U3.T2 | length 2899
  TopLayer (1 oz) w12: U1.U4@2560,2675 v1(2585,2650) ; v1(4854.41,1814.96) U3.T2@4874.1,1795.27
  MidLayer3 (0.5 oz) w5: v1(2585,2650) 2610,2625 2850,2625 3120,2355 3120,2120 3440,1800 3525,1800 3545,1780 3565,1780 3585,1800 3810,1800 3830,1780 3850,1780 3870,1800 4470,1800 4530,1860 4730,1860 4755.35,1834.65 4834.72,1834.65 v1(4854.41,1814.96)
TXDA0: pad.TVIA@3600,4200 U1.Y14 U2.A6 | length 2960.1
  TopLayer (1 oz) w12: U1.Y14@2710,3175 v1(2735,3200) ; v1(4775.67,4562.52) U2.A6@4795.35,4582.2
  MidLayer2 (0.5 oz) w5: v1(2735,3200) 3030,3495 3030,3965 3265,4200 3815,4200 3835,4180 3855,4180 3875,4200 4365,4200 4690,4525 4738.15,4525 v1(4775.67,4562.52)
TXDA1: pad.TVIA@3600,4100 U1.U12 U2.C2 | length 3197.5
  TopLayer (1 oz) w12: U1.U12@2560,3075 v1(2585,3100) ; v1(4854.41,4405.04) U2.C2@4874.1,4424.73
  MidLayer2 (0.5 oz) w5: v1(2585,3100) 2610,3075 2790,3075 3110,3395 3110,3885 3325,4100 3815,4100 3835,4080 3855,4080 3875,4100 4435,4100 4720.35,4385.35 4834.72,4385.35 v1(4854.41,4405.04)
TXDA2: pad.TVIA@3600,4150 U1.W14 U2.A4 | length 3015.8
  TopLayer (1 oz) w12: U1.W14@2660,3175 v1(2685,3200) ; v1(4775.67,4483.78) U2.A4@4795.35,4503.47
  MidLayer2 (0.5 oz) w5: v1(2685,3200) 2710,3175 2745,3175 2845,3275 2920,3275 3070,3425 3070,3925 3295,4150 3815,4150 3835,4130 3855,4130 3875,4150 4425,4150 4758.78,4483.78 v1(4775.67,4483.78)
TXDA3: pad.TVIA@3540,4220 U1.V14 U2.B6 | length 3148
  TopLayer (1 oz) w12: U1.V14@2610,3175 v1(2635,3200) ; v1(4815.04,4562.52) U2.B6@4834.73,4582.2
  MidLayer2 (0.5 oz) w5: v1(2635,3200) 2660,3225 2740,3225 2760,3245 2760,3250 2845,3335 2845,3380 2860,3395 2895,3395 3010,3510 3010,3985 3245,4220 3755,4220 3775,4240 3795,4240 3815,4220 4315,4220 4640,4545 4725,4545 4762.2,4582.2 4795.35,4582.2 v1(4815.04,4562.52)
TXDA4: pad.TVIA@3540,4320 U1.U14 U2.B8 | length 3267.7
  TopLayer (1 oz) w12: U1.U14@2560,3175 v1(2585,3200) ; v1(4815.04,4641.26) U2.B8@4834.73,4660.94
  MidLayer2 (0.5 oz) w5: v1(2585,3200) 2610,3225 2610,3255 2630,3275 2640,3275 2660,3295 2660,3305 2680,3325 2690,3325 2710,3345 2710,3395 2930,3615 2930,4065 3096.19,4231.19 3096.19,4251.19 3145.51,4300.51 3165.51,4300.51 3185,4320 3635,4320 3655,4340 3675,4340 3695,4320 3755,4320 3775,4340 3795,4340 3815,4320 4260,4320 4600.94,4660.94 4795.35,4660.94 v1(4815.04,4641.26)
TXDA5: pad.TVIA@3600,4250 U1.Y15 U2.A7 | length 3002.1
  TopLayer (1 oz) w12: U1.Y15@2710,3225 v1(2735,3250) ; v1(4775.67,4601.89) U2.A7@4795.35,4621.57
  MidLayer2 (0.5 oz) w5: v1(2735,3250) 2825,3340 2825,3395 2845,3415 2880,3415 2990,3525 2990,4005 3235,4250 3425,4250 3435,4260 3470,4260 3480,4250 3815,4250 3835,4230 3855,4230 3875,4250 4315,4250 4630,4565 4715,4565 4751.89,4601.89 v1(4775.67,4601.89)
TXDA6: pad.TVIA@3540,4270 U1.W15 U2.B7 | length 3099
  TopLayer (1 oz) w12: U1.W15@2660,3225 v1(2685,3250) ; v1(4815.04,4601.89) U2.B7@4834.73,4621.57
  MidLayer2 (0.5 oz) w5: v1(2685,3250) 2710,3275 2740,3275 2755,3290 2755,3300 2805,3350 2805,3410 2970,3575 2970,4025 3215,4270 3405,4270 3415,4280 3485,4280 3495,4270 3755,4270 3775,4290 3795,4290 3815,4270 4295,4270 4615,4590 4705,4590 4736.57,4621.57 4795.35,4621.57 v1(4815.04,4601.89)
TXDA7: pad.TVIA@3600,4300 U1.V15 U2.A8 | length 3138.4
  TopLayer (1 oz) w12: U1.V15@2610,3225 v1(2635,3250) ; v1(4775.67,4641.26) U2.A8@4795.35,4660.94
  MidLayer2 (0.5 oz) w5: v1(2635,3250) 2660,3275 2690,3275 2710,3295 2710,3305 2730,3325 2740,3325 2775,3360 2775,3420 2950,3595 2950,4045 3119.81,4214.81 3119.81,4249.81 3135,4265 3170,4265 3205,4300 3695,4300 3715,4280 3735,4280 3755,4300 3815,4300 3835,4280 3855,4280 3875,4300 4285,4300 4600,4615 4695,4615 4721.26,4641.26 v1(4775.67,4641.26)
TXDB0: pad.TVIA@3905,4470 U1.R18 U2.B11 | length 3255.7
  TopLayer (1 oz) w12: U1.R18@2460,3375 v1(2485,3400) ; v1(4815.04,4798.74) U2.B11@4834.73,4779.06
  MidLayer2 (0.5 oz) w5: v1(2485,3400) 2510,3425 2510,3455 2530,3475 2540,3475 2560,3495 2560,3505 2625,3570 2625,3585 2830,3790 2830,4180 2876.42,4226.42 2876.42,4236.42 2904.71,4264.71 2914.71,4264.71 3120,4470 3635,4470 3655,4490 3675,4490 3695,4470 4260,4470 4550,4760 4745,4760 4764.06,4779.06 4795.35,4779.06 v1(4815.04,4798.74)
TXDB1: pad.TVIA@3905,4420 U1.R17 U2.B10 | length 3282.5
  TopLayer (1 oz) w12: U1.R17@2460,3325 v1(2485,3350) ; v1(4815.04,4759.37) U2.B10@4834.73,4739.69
  MidLayer2 (0.5 oz) w5: v1(2485,3350) 2510,3375 2540,3375 2560,3395 2560,3405 2580,3425 2590,3425 2610,3445 2610,3455 2630,3475 2640,3475 2660,3495 2660,3505 2870,3715 2870,4125 2889.26,4144.26 2914.26,4144.26 2934.27,4164.27 2934.27,4189.27 3165,4420 3635,4420 3655,4440 3675,4440 3695,4420 3755,4420 3775,4440 3795,4440 3815,4420 4270,4420 4570,4720 4775.67,4720 v1(4815.04,4759.37)
TXDB2: pad.TVIA@3905,4570 U1.P20 U2.B13 | length 3340.8
  TopLayer (1 oz) w12: U1.P20@2410,3475 v1(2435,3500) ; v1(4815.04,4877.48) U2.B13@4834.73,4857.8
  MidLayer2 (0.5 oz) w5: v1(2435,3500) 2435,3540 2465,3570 2465,3630 2665,3830 2665,4100 2675,4110 2675,4270 2692.1,4287.1 2707.1,4287.1 2995,4575 3640,4575 3655,4590 3675,4590 3695,4570 4240,4570 4547.48,4877.48 v1(4815.04,4877.48)
TXDB3: pad.TVIA@3965,4600 U1.P19 U2.B14 | length 3497.1
  TopLayer (1 oz) w12: U1.P19@2410,3425 v1(2435,3450) ; v1(4815.04,4916.85) U2.B14@4834.73,4897.16
  MidLayer2 (0.5 oz) w5: v1(2435,3450) 2415,3470 2415,3625 2615,3825 2615,4145 2630,4160 2630,4275 2644.42,4289.42 2664.42,4289.42 2675,4300 2675,4320 2690,4335 2725,4335 2765,4375 2770,4375 2790,4395 2790,4415 3000,4625 3595,4625 3620,4600 3695,4600 3715,4580 3735,4580 3755,4600 4240,4600 4537.17,4897.17 4795.35,4897.17 v1(4815.04,4916.85)
TXDB4: pad.TVIA@3965,4550 U1.P18 U2.A12 | length 3364.7
  TopLayer (1 oz) w12: U1.P18@2410,3375 v1(2435,3400) ; v1(4775.67,4838.11) U2.A12@4795.35,4818.43
  MidLayer2 (0.5 oz) w5: v1(2435,3400) 2460,3425 2460,3525 2485,3550 2485,3610 2735,3860 2735,4095 2720,4110 2720,4160 2735,4175 2735,4250 3040,4555 3230,4555 3235,4550 3405,4550 3410,4555 3535,4555 3540,4550 3695,4550 3715,4530 3735,4530 3755,4550 4250,4550 4545,4845 4700,4845 4706.89,4838.11 v1(4775.67,4838.11)
TXDB5: pad.TVIA@3965,4450 U1.P17 U2.A10 | length 3296.1
  TopLayer (1 oz) w12: U1.P17@2410,3325 v1(2435,3350) ; v1(4775.67,4759.37) U2.A10@4795.35,4739.69
  MidLayer2 (0.5 oz) w5: v1(2435,3350) 2460,3375 2490,3375 2510,3395 2510,3405 2530,3425 2540,3425 2560,3445 2560,3455 2580,3475 2590,3475 2610,3495 2610,3505 2630,3525 2645,3525 2850,3730 2850,4160 2897.97,4207.97 2907.97,4207.97 2940.4,4240.4 2940.4,4250.4 3140,4450 3695,4450 3715,4430 3735,4430 3755,4450 3815,4450 3835,4430 3855,4430 3875,4450 4270,4450 4560,4740 4756.3,4740 v1(4775.67,4759.37)
TXDB6: pad.TVIA@3905,4670 U1.L20 U2.C17 | length 3668.9
  TopLayer (1 oz) w12: v1(2235,3500) U1.L20@2260,3475 ; v1(4854.41,5034.96) U2.C17@4874.1,5015.27
  MidLayer2 (0.5 oz) w5: v1(2235,3500) 2235,3590 2430,3785 2430,4265 2850,4685 3650,4685 3655,4690 3675,4690 3695,4670 4220,4670 4565.28,5015.28 4834.72,5015.28 v1(4854.41,5034.96)
TXDB7: pad.TVIA@3905,4520 U1.R20 U2.B12 | length 3258.5
  TopLayer (1 oz) w12: U1.R20@2460,3475 v1(2485,3500) ; v1(4815.04,4838.11) U2.B12@4834.73,4818.43
  MidLayer2 (0.5 oz) w5: v1(2485,3500) 2485,3515 2535,3565 2535,3615 2760,3840 2760,4225 2808.06,4273.06 2808.06,4288.06 2894.46,4374.46 2909.46,4374.46 3055,4520 3145,4520 3165,4540 3205,4540 3225,4520 3405,4520 3425,4540 3525,4540 3545,4520 4250,4520 4555,4825 4690,4825 4696.57,4818.43 4795.35,4818.43 v1(4815.04,4838.11)
TXDC0: pad.TVIA@3900,1220 U1.F3 U3.P17 | length 4003.5
  TopLayer (1 oz) w12: v1(1985,2600) U1.F3@2010,2625 ; v1(4933.15,1185.04) U3.P17@4952.84,1204.73
  MidLayer3 (0.5 oz) w5: v1(1985,2600) 1960,2575 1960,2405 2100,2265 2100,1855 2125,1830 2325,1830 2935,1220 4570,1220 4624.65,1165.35 4913.46,1165.35 v1(4933.15,1185.04)
TXDC1: pad.TVIA@3960,1300 U1.G4 U3.U14 | length 3648.5
  TopLayer (1 oz) w12: v1(2035,2650) U1.G4@2060,2675 ; v1(4815.04,1303.15) U3.U14@4834.73,1322.84
  MidLayer3 (0.5 oz) w5: v1(2035,2650) 2060,2625 2060,2485 2085,2460 2085,2375 2330,2130 2330,1965 2690,1605 2865,1605 3170,1300 4735,1300 4757.83,1322.83 4795.35,1322.83 v1(4815.04,1303.15)
TXDC2: pad.TVIA@3960,1400 U1.J3 U3.U12 | length 3396.3
  TopLayer (1 oz) w12: U1.J3@2160,2625 v1(2185,2600) ; v1(4815.04,1381.89) U3.U12@4834.73,1401.57
  MidLayer3 (0.5 oz) w5: v1(2185,2600) 2210,2575 2210,2465 2260,2415 2260,2340 2475,2125 2475,2065 2580,1960 2600,1960 2615,1945 2615,1925 2625,1915 2640,1915 2660,1895 2660,1880 2795,1745 2855,1745 3200,1400 3690,1400 3710,1380 3730,1380 3750,1400 4550,1400 4570,1380 4675,1380 4696.57,1401.57 4795.35,1401.57 v1(4815.04,1381.89)
TXDC3: pad.TVIA@3900,1370 U1.J4 U3.V12 | length 3449.4
  TopLayer (1 oz) w12: U1.J4@2160,2675 v1(2185,2650) ; v1(4775.67,1381.89) U3.V12@4795.35,1401.57
  MidLayer3 (0.5 oz) w5: v1(2185,2650) 2160,2625 2160,2475 2185,2450 2185,2385 2430,2140 2430,2025 2450,2005 2485,2005 2575,1915 2595,1915 2610,1900 2610,1885 2775,1720 2840,1720 3190,1370 4540,1370 4550,1360 4690,1360 4711.89,1381.89 v1(4775.67,1381.89)
TXDC4: pad.TVIA@3960,1250 U1.G3 U3.T17 | length 3770.6
  TopLayer (1 oz) w12: v1(2035,2600) U1.G3@2060,2625 ; v1(4854.41,1185.04) U3.T17@4874.1,1204.73
  MidLayer3 (0.5 oz) w5: v1(2035,2600) 2010,2575 2010,2465 2035,2440 2035,2360 2200,2195 2200,1955 2225,1930 2295,1930 2975,1250 4570,1250 4615.28,1204.72 4834.72,1204.72 v1(4854.41,1185.04)
TXDC5: pad.TVIA@3900,1320 U1.J2 U3.V13 | length 3430.8
  TopLayer (1 oz) w12: v1(2135,2550) U1.J2@2160,2575 ; v1(4775.67,1342.52) U3.V13@4795.35,1362.2
  MidLayer3 (0.5 oz) w5: v1(2135,2550) 2110,2525 2110,2390 2355,2145 2355,2010 2715,1650 2850,1650 3180,1320 4720,1320 4742.52,1342.52 v1(4775.67,1342.52)
TXDC6: pad.TVIA@3960,1500 U1.L4 U3.U10 | length 3286
  TopLayer (1 oz) w12: U1.L4@2260,2675 v1(2285,2650) ; v1(4815.04,1460.63) U3.U10@4834.73,1480.31
  MidLayer3 (0.5 oz) w5: v1(2285,2650) 2310,2625 2310,2475 2335,2450 2335,2415 2405,2345 2500,2345 2715,2130 2715,2065 2725,2055 2745,2055 2815,1985 2815,1950 2925,1840 3000,1840 3340,1500 3690,1500 3710,1480 3730,1480 3750,1500 3810,1500 3830,1480 3850,1480 3870,1500 4775.67,1500 v1(4815.04,1460.63)
TXDC7: pad.TVIA@3900,1270 U1.G1 U3.U16 | length 3541
  TopLayer (1 oz) w12: v1(2035,2500) U1.G1@2060,2525 ; v1(4815.04,1224.41) U3.U16@4834.73,1244.1
  MidLayer3 (0.5 oz) w5: v1(2035,2500) 2035,2475 2060,2450 2060,2365 2300,2125 2300,1960 2680,1580 2860,1580 3170,1270 4560,1270 4570,1280 4715,1280 4750.91,1244.09 4795.35,1244.09 v1(4815.04,1224.41)
TXDD0: pad.TVIA@4020,1570 U1.U1 U3.U8 | length 2876.6
  TopLayer (1 oz) w12: U1.U1@2560,2525 v1(2585,2500) ; v1(4815.04,1578.74) U3.U8@4834.73,1559.06
  MidLayer3 (0.5 oz) w5: v1(2585,2500) 2585,2450 2595,2440 2595,2390 2660,2325 2705,2325 2920,2110 2920,1950 2930,1940 3000,1940 3370,1570 3630,1570 3650,1590 3670,1590 3690,1570 3750,1570 3770,1590 3790,1590 3810,1570 4579.06,1570 4590,1559.06 4795.35,1559.06 v1(4815.04,1578.74)
TXDD1: pad.TVIA@4080,1600 U1.U2 U3.V8 | length 2839.4
  TopLayer (1 oz) w12: U1.U2@2560,2575 v1(2585,2550) ; v1(4775.67,1578.74) U3.V8@4795.35,1559.06
  MidLayer3 (0.5 oz) w5: v1(2585,2550) 2610,2525 2610,2465 2625,2450 2625,2400 2665,2360 2710,2360 2960,2110 2960,1985 2980,1965 3005,1965 3370,1600 3690,1600 3710,1580 3730,1580 3750,1600 3810,1600 3830,1580 3850,1580 3870,1600 4575,1600 4590,1615 4695,1615 4731.26,1578.74 v1(4775.67,1578.74)
TXDD2: pad.TVIA@4080,1550 U1.U3 U3.V9 | length 2993.8
  TopLayer (1 oz) w12: U1.U3@2560,2625 v1(2585,2600) ; v1(4775.67,1539.37) U3.V9@4795.35,1519.69
  MidLayer3 (0.5 oz) w5: v1(2585,2600) 2560,2575 2560,2475 2545,2460 2545,2405 2755,2195 2755,2175 2765,2165 2820,2165 2900,2085 2900,1940 2925,1915 2995,1915 3360,1550 3690,1550 3710,1530 3730,1530 3750,1550 3810,1550 3830,1530 3850,1530 3870,1550 4560,1550 4570.63,1539.37 v1(4775.67,1539.37)
TXDD3: pad.TVIA@4020,1620 U1.V1 U3.U7 | length 2749.5
  TopLayer (1 oz) w12: U1.V1@2610,2525 v1(2635,2500) ; v1(4815.04,1618.11) U3.U7@4834.73,1598.43
  MidLayer3 (0.5 oz) w5: v1(2635,2500) 2635,2475 2980,2130 2980,2050 3220,1810 3220,1780 3380,1620 3630,1620 3650,1640 3670,1640 3690,1620 3750,1620 3770,1640 3790,1640 3810,1620 4555,1620 4570,1635 4705,1635 4741.57,1598.43 4795.35,1598.43 v1(4815.04,1618.11)
TXDD4: pad.TVIA@4080,1650 U1.V2 U3.V7 | length 2720.9
  TopLayer (1 oz) w12: U1.V2@2610,2575 v1(2635,2550) ; v1(4775.67,1618.11) U3.V7@4795.35,1598.43
  MidLayer3 (0.5 oz) w5: v1(2635,2550) 2660,2525 2660,2485 2695,2450 2730,2450 2755,2425 2755,2390 3000,2145 3000,2060 3410,1650 3690,1650 3710,1630 3730,1630 3750,1650 3810,1650 3830,1630 3850,1630 3870,1650 4545,1650 4550,1655 4715,1655 4751.89,1618.11 v1(4775.67,1618.11)
TXDD5: pad.TVIA@4020,1670 U1.W1 U3.U6 | length 2655.4
  TopLayer (1 oz) w12: U1.W1@2660,2525 v1(2685,2500) ; v1(4815.04,1657.48) U3.U6@4834.73,1637.8
  MidLayer3 (0.5 oz) w5: v1(2685,2500) 2710,2475 2745,2475 2775,2445 2775,2410 3020,2165 3020,2070 3420,1670 3630,1670 3650,1690 3670,1690 3690,1670 4525,1670 4530,1675 4725,1675 4762.2,1637.8 4795.35,1637.8 v1(4815.04,1657.48)
TXDD6: pad.TVIA@4080,1700 U1.Y1 U3.V6 | length 2551.4
  TopLayer (1 oz) w12: U1.Y1@2710,2525 v1(2735,2500) ; v1(4775.67,1657.48) U3.V6@4795.35,1637.8
  MidLayer3 (0.5 oz) w5: v1(2735,2500) 2760,2500 3040,2220 3040,2080 3420,1700 3690,1700 3710,1680 3730,1680 3750,1700 4525,1700 4530,1695 4738.15,1695 v1(4775.67,1657.48)
TXDD7: pad.TVIA@4020,1720 U1.W2 U3.U5 | length 2682.3
  TopLayer (1 oz) w12: U1.W2@2660,2575 v1(2685,2550) ; v1(4815.04,1696.85) U3.U5@4834.73,1677.16
  MidLayer3 (0.5 oz) w5: v1(2685,2550) 2710,2525 2800,2525 3060,2265 3060,2090 3430,1720 3630,1720 3650,1740 3670,1740 3690,1720 3750,1720 3770,1740 3790,1740 3810,1720 4545,1720 4548.46,1716.54 4795.35,1716.54 v1(4815.04,1696.85)
TXERRA: pad.TVIA@3540,4120 U1.W12 U2.B3 | length 3073.2
  TopLayer (1 oz) w12: U1.W12@2660,3075 v1(2685,3100) ; v1(4815.04,4444.41) U2.B3@4834.73,4464.1
  MidLayer2 (0.5 oz) w5: v1(2685,3100) 2705,3120 2765,3120 2900,3255 2935,3255 3090,3410 3090,3905 3305,4120 3755,4120 3775,4140 3795,4140 3815,4120 4090,4120 4110,4140 4130,4140 4150,4120 4425,4120 4729.73,4424.73 4795.35,4424.73 v1(4815.04,4444.41)
TXERRB: pad.TVIA@3905,4620 U1.M19 U2.B16 | length 3572.1
  TopLayer (1 oz) w12: U1.M19@2310,3425 v1(2335,3450) ; v1(4815.04,4995.59) U2.B16@4834.73,4975.9
  MidLayer2 (0.5 oz) w5: v1(2335,3450) 2360,3475 2360,3535 2385,3560 2385,3640 2582.86,3837.86 2582.86,4277.86 2595,4290 2620,4290 2630,4300 2630,4330 2671.76,4371.76 2691.76,4371.76 2759.09,4439.09 2769.09,4439.09 2795,4465 2795,4475 2965,4645 3610,4645 3620.75,4634.25 3649.25,4634.25 3655,4640 3675,4640 3695,4620 4230,4620 4530,4920 4739.45,4920 v1(4815.04,4995.59)
TXERRC: pad.TVIA@3900,1520 U1.M4 U3.U9 | length 3233.3
  TopLayer (1 oz) w12: U1.M4@2310,2675 v1(2335,2650) ; v1(4815.04,1539.37) U3.U9@4834.73,1519.69
  MidLayer3 (0.5 oz) w5: v1(2335,2650) 2360,2625 2360,2420 2415,2365 2510,2365 2840,2035 2840,1960 2935,1865 3010,1865 3355,1520 3485,1520 3505,1540 3525,1540 3545,1520 3630,1520 3650,1540 3670,1540 3690,1520 3750,1520 3770,1540 3790,1540 3810.31,1519.69 4795.35,1519.69 v1(4815.04,1539.37)
TXERRD: pad.TVIA@4020,1820 U1.Y17 U3.R1 | length 3385.2
  TopLayer (1 oz) w12: U1.Y17@2710,3325 v1(2735,3350) ; v1(4893.78,1854.33) U3.R1@4913.47,1834.65
  MidLayer3 (0.5 oz) w5: v1(2735,3350) 2785,3300 2785,3235 2875,3145 2875,2635 3140,2370 3140,2130 3450,1820 3750,1820 3770,1840 3790,1840 3810,1820 4450,1820 4510,1880 4868.11,1880 v1(4893.78,1854.33)
U\L\C\A\: pad.TVIA@3845,4450 U1.D6 U2.E15 | length 4965.5
  TopLayer (1 oz) w12: v1(1885,2750) U1.D6@1910,2775 ; v1(4933.15,4956.22) U2.E15@4952.84,4936.53
  MidLayer3 (0.5 oz) w5: v1(1885,2750) 1860,2775 1860,3305 1840,3325 1830,3325 1810,3345 1810,3475 1830,3495 1830,3515 1810,3535 1810,3650 2016.78,3856.78 2136.78,3856.78 2313.18,4033.18 2313.18,4153.18 2580,4420 2610,4420 2685,4495 2815,4495 2860,4450 3695,4450 3715,4430 3735,4430 3755,4450 pad.TVIA@3845,4450 3890,4495 3925,4495 3955,4525 4075,4525 4650,5100 4860,5100 4913.47,5046.53 4913.47,4975.9 v1(4933.15,4956.22)
U\L\C\B\: pad.TVIA@3725,4700 U1.D15 U2.D17 | length 4273.8
  TopLayer (1 oz) w12: v1(1885,3250) U1.D15@1910,3225 ; v1(4893.78,5034.96) U2.D17@4913.47,5015.27
  MidLayer4 (0.5 oz) w5: v1(1885,3250) 1910,3275 1910,3760 2080,3930 2175,3930 2190,3945 2209.14,3945 2278.68,4014.54 2278.68,4033.68 2345,4100 2345,4180 2448.49,4283.49 2448.49,4403.49 2595,4550 2595,4565 2730,4700 2895,4700 2920,4725 3605,4725 3630,4700 pad.TVIA@3725,4700 3750,4725 4340,4725 4560,4945 4560,4980 4595.28,5015.28 4874.09,5015.28 v1(4893.78,5034.96)
U\L\C\C\: pad.TVIA@3660,1420 U1.C7 U3.R16 | length 4281
  TopLayer (1 oz) w12: v1(1835,2800) U1.C7@1860,2825 ; v1(4893.78,1224.41) U3.R16@4913.47,1244.1
  MidLayer1 (0.5 oz) w5: v1(1835,2800) 1860,2775 1860,2675 1910,2625 1910,2305 2000,2215 2000,1855 2025,1830 2410,1830 2490,1750 3055,1750 3385,1420 3750,1420 3770,1440 3790,1440 3810,1420 3870,1420 3890,1440 3910,1440 3930,1420 4305,1420 4520.28,1204.72 4874.1,1204.72 v1(4893.78,1224.41)
U\L\C\D\: pad.TVIA@3840,1450 U1.C6 U3.R17 | length 3969
  TopLayer (1 oz) w12: v1(1835,2750) U1.C6@1860,2775 ; v1(4893.78,1185.04) U3.R17@4913.47,1204.73
  MidLayer2 (0.5 oz) w5: v1(1835,2750) 1860,2725 1860,2490 1900,2450 1915,2450 2060,2305 2235,2305 2580,1960 2600,1960 2615,1945 2615,1925 2625,1915 2770,1915 2890,1795 2945,1795 3290,1450 3420,1450 3440,1430 3525,1430 3545,1450 3690,1450 3710,1430 3730,1430 3750,1450 4200,1450 4484.65,1165.35 4874.1,1165.35 v1(4893.78,1185.04)
W\R\E\N\: U1.G2 U14.31 | length 4274.3
  TopLayer (1 oz) w5: v1(2035,2550) U1.G2@2060,2575 ; U14.31@5054.96,3287.5 v1(5117.5,3287.5)
  BottomLayer (1 oz) w5: v1(2035,2550) 2010,2575 1975,2575 1960,2590 1960,2610 1945,2625 1910,2625 1860,2675 1860,3075 1885,3100 2500,3100 2575,3175 2740,3175 2770,3205 2770,3240 2805,3275 2980,3275 3085,3380 3570,3380 3680,3270 4080,3270 4195,3385 5020,3385 v1(5117.5,3287.5)
XDATA: JB5.5 U7.86 U14.25 | length 2485.1
  TopLayer (1 oz) w5: U14.25@5054.96,3437.5 v1(5117.5,3437.5) ; U7.86@6424.84,2664.92 v1(6424.84,2769.84)
  BottomLayer (1 oz) w5: v1(5117.5,3437.5) 5292.5,3437.5 5395,3335 5395,2935 5570,2760 5650,2760 5880,2990 5880,3030 6050,3200 6155,3200 6255,3100 6285,3100 6424.84,2960.16 v1(6424.84,2769.84)
XRES: R200.1 U7.88 | length 975.3
  TopLayer (1 oz) w5: R200.1@6010,3160 6010,3205 v1(6050,3245) ; U7.88@6476.02,2664.92 v1(6476.02,2821.02)
  BottomLayer (1 oz) w5: v1(6050,3245) 6180,3245 6250,3175 6320,3175 6476.02,3018.98 v1(6476.02,2821.02)
XRES_07: JB5.3 R200.2 U14.35 | length 995.4
  TopLayer (1 oz) w5: U14.35@5054.96,3187.5 v1(5117.5,3187.5) ; JB5.3@5820,3130 5860,3090 R200.2@6010,3090
  MidLayer1 (0.5 oz) w5: v1(5117.5,3187.5) 5407.5,3187.5 5465,3130 JB5.3@5820,3130
XSCLK: JB5.4 U7.87 U14.23 | length 1723.6
  TopLayer (1 oz) w5: U14.23@5425.04,3412.5 5487.5,3412.5 5600,3300 5600,3250 JB5.4@5820,3030 ; U7.87@6450.43,2664.92 v1(6450.43,2794.57)
  BottomLayer (1 oz) w5: JB5.4@5820,3030 6010,3220 6170,3220 6230,3160 6300,3160 6450.43,3009.57 v1(6450.43,2794.57)
pads on no net: D1.2 D2.2 D32.2 D33.2 FID1.Fiducial FID2.Fiducial FID3.Fiducial FID4.Fiducial FID5.Fiducial FID6.Fiducial J1.3 J20.1 JB5.1 JP9.8 U1.Y10 U2.B5 U2.C9 U2.C10 U2.D15 U2.E5 U2.E6 U2.E7 U2.E8 U2.E10 U2.E11 U2.E13 U2.E14 U2.E17 U2.F1 U2.F5 U2.F6 U2.F7 U2.F12 U2.F13 U2.F14 U2.F15 U2.G1 U2.G2 U2.G3 U2.G4 U2.G5 U2.G6 U2.G12 U2.G13 U2.G14 U2.G15 U2.G16 U2.G17 U2.H1 U2.H2 U2.H5 U2.H6 U2.H13 U2.H14 U2.H16 U2.H17 U2.J13 U2.J14 U2.K2 U2.L5 U2.L6 U2.L7 U2.L13 U2.L14 U2.L15 U2.M5 U2.M6 U2.M13 U2.M14 U2.M15 U2.N5 U2.N6 U2.N7 U2.N12 U2.N13 U2.N14 U2.N15 U2.P4 U2.P5 U2.P6 U2.P7 U2.P9 U2.P10 U2.P12 U2.P13 U2.P14 U2.P15 U3.E4 U3.E5 U3.E6 U3.E7 U3.E8 U3.E10 U3.E11 U3.E13 U3.E14 U3.E15 U3.F5 U3.F6 U3.F7 U3.F12 U3.F13 U3.F14 U3.F15 U3.G5 U3.G6 U3.G12 U3.G13 U3.G14 U3.G15 U3.H5 U3.H6 U3.H13 U3.H14 U3.H15 U3.J13 U3.K2 U3.L4 U3.L5 U3.L6 U3.L7 U3.L13 U3.L14 U3.L15 U3.L16 U3.M3 U3.M4 U3.M5 U3.M6 U3.M13 U3.M14 U3.M15 U3.M16 U3.N1 U3.N2 U3.N3 U3.N4 U3.N5 U3.N6 U3.N7 U3.N12 U3.N13 U3.N14 U3.N15 U3.N16 U3.P2 U3.P5 U3.P6 U3.P7 U3.P9 U3.P10 U3.P12 U3.P13 U3.P14 U3.R4 U3.R15 U3.T7 U3.T8 U3.U11 U6.4 U7.13 U7.14 U7.15 U7.28 U7.31 U7.32 U7.40 U7.42 U7.51 U7.52 U7.64 U7.76 U7.89 U7.90 U7.91 U7.92 U7.93 U9.2 U9.7 U9.8 U10.2 U10.5 U10.11 U10.12 U10.13 U10.15 U10.16 U10.19 U10.20 U10.23 U10.28 U10.29 U11.2 U11.5 U11.11 U11.12 U11.13 U11.15 U11.16 U11.19 U11.20 U11.23 U11.28 U11.29 U12.2 U12.5 U12.11 U12.12 U12.13 U12.15 U12.16 U12.19 U12.20 U12.23 U12.28 U12.29 U13.2 U13.5 U13.11 U13.12 U13.13 U13.15 U13.16 U13.19 U13.20 U13.23 U13.28 U13.29 U14.13 U14.16 U14.22 U14.26 U14.27 U14.28 U15.P4 U15.P5 U15.P6 U15.P7 U24.1 U25.3 U26.3 U28.8 U28.13 X2.1 X2.2 X3.1 X3.2 X4.1 X4.2 X5.1 X5.2
copper on no net: | length 90
  MidLayer2 (0.5 oz) w5: 2165,4005 2165,4095